# EAGLE board PCBMotores (EAGLE 7.6.0)
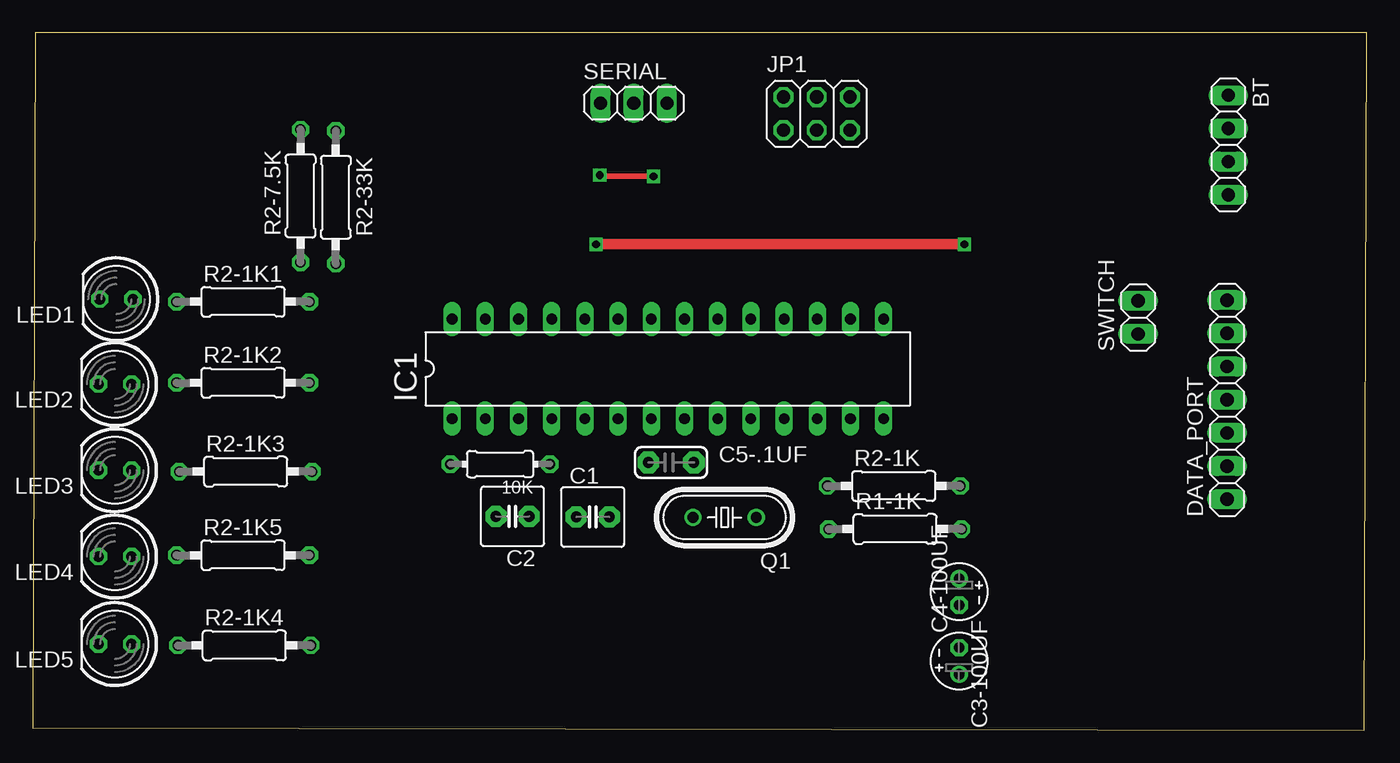
[diagram p0: board, top side]
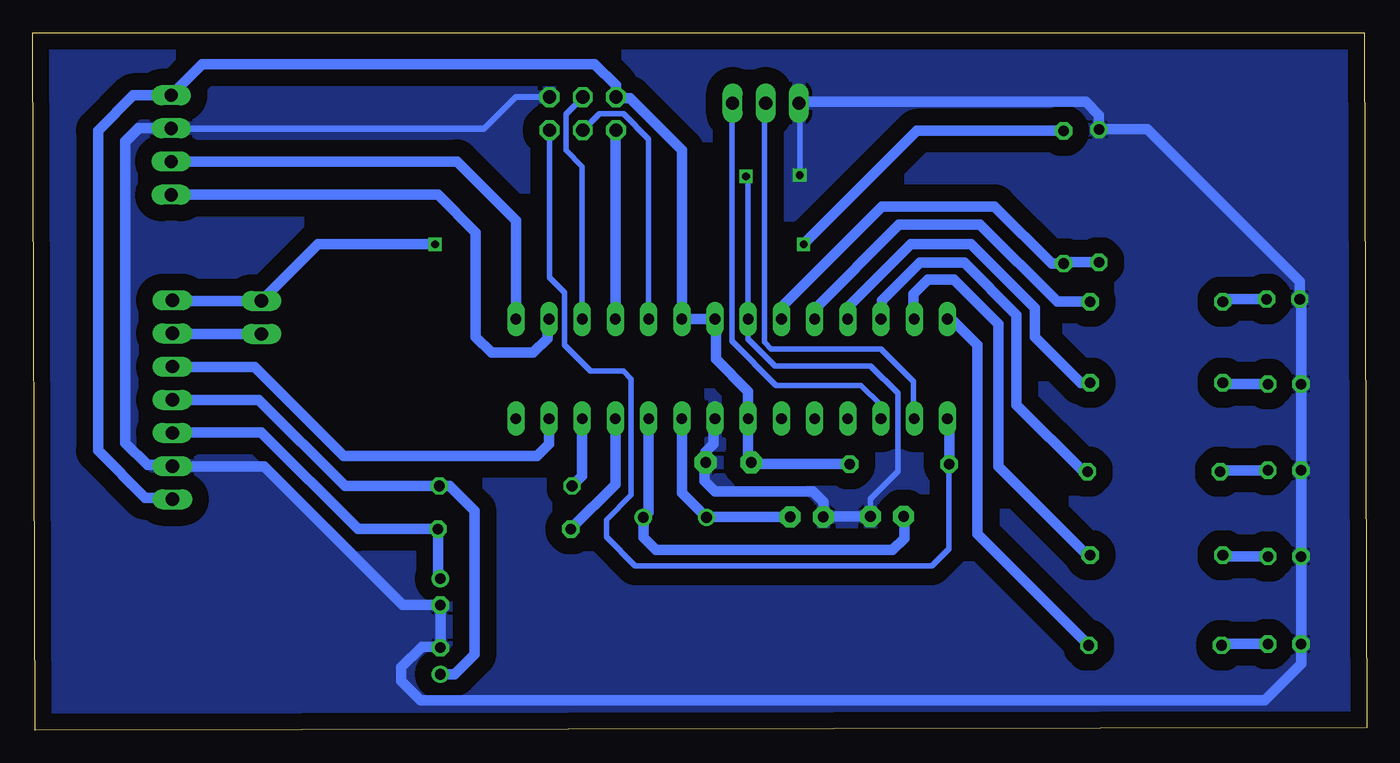
[diagram p1: board, bottom side, seen from below]

Size 102.1 x 53.4 mm. Coordinates in mm from the lower left corner, seen from the top.
Outline: 0,0.2 101.9,0 102.1,53.4 0.2,53.4 0,0.2
Copper layers (1*16): Top 0.035mm / dielectric 1.5mm / Bottom 0.035mm
Design rules "default": minimum track width 10mil, minimum drill 24mil, track to track 8mil, track to pad 8mil, pad to pad 8mil, via to via 8mil, smd to smd 8mil, copper to edge 40mil, drill to drill 8mil, minimum pad ring 10mil, minimum via ring 8mil, stop-mask expansion 4mil, vias tented up to drill 0mil, thermal gap 10mil

## Footprints (pad centres in the part's own frame; a part is rotated, then mirrored left to right if it is on the bottom)
0204/7 = drill 0.813 octagon: 1 -3.81,0; 2 3.81,0
1X04 = drill 1.016 long: 1 -3.81,0; 2 -1.27,0; 3 1.27,0; 4 3.81,0
C2.5-5 = drill 0.813 pad 1.6 octagon: 1 -1.27,0; 2 1.27,0
E2-4 = drill 0.813 pad 1.27: + -1.016,0 | drill 0.813 pad 1.27 octagon: - 1.016,0
C035-055X025 = drill 0.813 pad 1.676 octagon: 1 -1.587,0; 2 1.905,0
1X07 = drill 1.016 long: 1 -7.62,0; 2 -5.08,0; 3 -2.54,0; 4 0,0; 5 2.54,0; 6 5.08,0; 7 7.62,0
DIL28-3 = drill 0.813 long: 1 -16.51,-3.81; 2 -13.97,-3.81; 3 -11.43,-3.81; 4 -8.89,-3.81; 5 -6.35,-3.81; 6 -3.81,-3.81; 7 -1.27,-3.81; 8 1.27,-3.81; 9 3.81,-3.81; 10 6.35,-3.81; 11 8.89,-3.81; 12 11.43,-3.81; 13 13.97,-3.81; 14 16.51,-3.81; 15 16.51,3.81; 16 13.97,3.81; 17 11.43,3.81; 18 8.89,3.81; 19 6.35,3.81; 20 3.81,3.81; 21 1.27,3.81; 22 -1.27,3.81; 23 -3.81,3.81; 24 -6.35,3.81; 25 -8.89,3.81; 26 -11.43,3.81; 27 -13.97,3.81; 28 -16.51,3.81
2X03 = drill 1.016 octagon: 1 -2.54,-1.27; 2 -2.54,1.27; 3 0,-1.27; 4 0,1.27; 5 2.54,-1.27; 6 2.54,1.27
LED5MM = drill 0.813 octagon: A -1.27,0; K 1.27,0
HC49/S = drill 0.813: 1 -2.413,0; 2 2.413,0
0207/10 = drill 0.813 octagon: 1 -5.08,0; 2 5.08,0
1X03 = drill 1.016 long: 1 -2.54,0; 2 0,0; 3 2.54,0
1X02 = drill 1.016 long: 1 -1.27,0; 2 1.27,0

## Placement (x,y rotation side)
10K  [0204/7]  35.77,20.37 180 top
BT  [1X04]  91.5,44.8 270 top
C1  [C2.5-5]  42.86,16.33 0 top
C2  [C2.5-5]  36.72,16.37 180 top
C3-100UF  [E2-4]  70.9,10.6 270 top
C4-100UF  [E2-4]  70.9,5.3 90 top
C5-.1UF  [C035-055X025]  48.7,20.5 0 top
DATA_PORT  [1X07]  91.4,25.3 90 top
IC1  MEGA8-P  [DIL28-3]  48.61,27.67 0 top
JP1  [2X03]  60,47.2 0 top
LED1  [LED5MM]  6.4,33 180 top
LED2  [LED5MM]  6.3,26.5 180 top
LED3  [LED5MM]  6.3,19.9 180 top
LED4  [LED5MM]  6.3,13.3 180 top
LED5  [LED5MM]  6.3,6.6 180 top
Q1  [HC49/S]  52.95,16.29 180 top
R1-1K  [0207/10]  66,15.4 0 top
R2-1K  [0207/10]  65.9,18.7 0 top
R2-1K1  [0207/10]  16.1,32.8 0 top
R2-1K2  [0207/10]  16.1,26.6 0 top
R2-1K3  [0207/10]  16.3,19.8 0 top
R2-1K4  [0207/10]  16.2,6.5 0 top
R2-1K5  [0207/10]  16.1,13.4 0 top
R2-7.5K  [0207/10]  20.5,40.9 90 top
R2-33K  [0207/10]  23.2,40.8 270 top
SERIAL  [1X03]  46,48 0 top
SWITCH  [1X02]  84.6,31.6 90 top

## Library data of the parts
10K C3-100UF C4-100UF R1-1K R2-1K R2-1K1-R2-1K5 R2-7.5K R2-33K = rcl
BT DATA_PORT JP1 SERIAL SWITCH = pinhead
C1 C2 = capacitor-wima
C5-.1UF = cap-master
IC1 = atmel; OC_FARNELL: unknown; OC_NEWARK: unknown
LED1-LED5 = led
Q1 = crystal; OC_FARNELL: 1667008; OC_NEWARK: unknown

## Nets
5V: 10K.1 BT.1 C5-.1UF.1 DATA_PORT.1 IC1.7 IC1.20 IC1.21 JP1.2
ANA_D: C4-100UF.+ DATA_PORT.4 R2-1K.2
ANA_I: C3-100UF.+ DATA_PORT.3 R1-1K.2
BAT: IC1.23 R2-7.5K.1 R2-33K.2
FRENOS: DATA_PORT.5 IC1.13
GND: BT.2 C1.1 C2.1 C3-100UF.- C4-100UF.- C5-.1UF.2 DATA_PORT.2 IC1.8 IC1.22 JP1.6 LED1.K LED2.K LED3.K LED4.K LED5.K R2-7.5K.2 SERIAL.1
MISO: IC1.18 JP1.1
MOSI: IC1.17 JP1.4
N$3: IC1.24 R2-1K1.2
N$4: IC1.25 R2-1K2.2
N$5: IC1.26 R2-1K3.2
N$6: C2.2 IC1.10 Q1.1
N$7: C1.2 IC1.9 Q1.2
N$8: IC1.27 R2-1K5.2
N$9: IC1.28 R2-1K4.2
N$10: LED1.A R2-1K1.1
N$11: LED2.A R2-1K2.1
N$12: LED3.A R2-1K3.1
N$13: LED4.A R2-1K5.1
N$14: LED5.A R2-1K4.1
PWMD: IC1.12 R2-1K.1
PWMI: IC1.11 R1-1K.1
RS: 10K.2 IC1.1 JP1.5
RX: IC1.2 SERIAL.2
RX-BT: BT.3 IC1.15
SCK: IC1.19 JP1.3
SW1: DATA_PORT.6 SWITCH.1
SW2: DATA_PORT.7 R2-33K.1 SWITCH.2
TX: IC1.3 SERIAL.3
TX-BT: BT.4 IC1.16

## Tracks (layer width: path | path; a pad name or v marks a point on that pad's centre or on a via)
5V
  Bottom 0.813: 10K.1 46.98,20.37 C5-.1UF.1 47.34,20.73 IC1.7 47.34,25.94 49.8,28.4 49.8,31.4 IC1.21 IC1.20 52.42,44.42 56.4,48.4 57.39,48.4 JP1.2 57.46,49.36 59.1,51 89.11,51 BT.1 94.39,48.61 97.1,45.9 97.1,21.4 93.5,17.8 91.52,17.8 DATA_PORT.1
ANA_D
  Bottom 0.813: C4-100UF.+ 70.88,4.3 69.8,4.3 68.3,5.8 68.3,16.8 70.2,18.7 R2-1K.2 78.2,18.7 84.8,25.3 DATA_PORT.4
ANA_I
  Bottom 0.813: C3-100UF.+ 71.08,11.8 R1-1K.2 77.2,15.4 84.6,22.8 91.36,22.8 DATA_PORT.3
BAT
  Bottom 0.813: IC1.23 44.8,32.4 37.1,40.1 28.5,40.1 24.12,35.72 R2-33K.2 23.1,35.82 R2-7.5K.1
FRENOS
  Bottom 0.813: IC1.13 62.58,21.92 63.5,21 78.3,21 85.1,27.8 91.36,27.8 DATA_PORT.5
GND  (via drill 0.6)
  Top 0.406: v47.5,42.4 43.5,42.4 v43.4,42.5
  Bottom 0.406: v47.5,42.4 47.34,42.24 IC1.22 47.34,29.94 45.3,27.9 38,27.9 35.9,25.8 35.9,19.8 38,17.7 C2.1 | v43.4,42.5 43.4,47.94 SERIAL.1 | C3-100UF.- 73.98,9.58 84.5,20.1 93,20.1 95.1,22.2 95.1,45.1 94.2,46 67.6,46 67.5,46.1 | 65.13,48.47 65.1,48.5 62.57,48.5 JP1.6 65.13,48.47 | 65.13,48.47 67.5,46.1 | 67.5,46.1 93.7,46.1 95,44.8 95,22.2 93.2,20.4 84.5,20.4 73.6,9.5 71,9.5 70.9,9.6 70.9,6.5 70.8,6.4
  Bottom 0.813: IC1.8 50,23.74 50,21.9 50.61,21.3 C5-.1UF.2 50.7,20.41 50.7,19.1 49.9,18.3 42.4,18.3 41.59,17.49 C1.1 41.55,16.37 C2.1 | C4-100UF.- C3-100UF.- 73.78,9.58 84.4,20.2 91.38,20.2 DATA_PORT.2 91.48,20.3 93.3,20.3 95,22 95,44.8 95,45.1 94.03,46.07 BT.2 | SERIAL.1 43.36,48.1 21.5,48.1 20.5,47.1 R2-7.5K.2 20.48,46 16.8,46 5.13,34.33 LED1.K 5.03,32.9 LED2.K LED3.K LED4.K LED5.K 5,6.57 5,5.1 7.8,2.3 72.4,2.3 73.9,3.8 73.9,4.8 72.3,6.4 70.8,6.4
  pour Bottom (isolate 1.27): 100.8,52 100.6,1.1 1.3,1.2 1.5,52.1
MISO
  Bottom 0.813: IC1.18 57.5,45.89 JP1.1
MOSI
  Bottom 0.406: IC1.17 60.04,43.14 61.3,44.4 61.3,47.17 JP1.4
N$3
  Bottom 0.813: R2-1K1.2 23.7,32.8 29.6,38.7 35.8,38.7 42.4,32.1 42.4,31.62 IC1.24
N$4
  Bottom 0.813: R2-1K2.2 21.9,26.6 25.4,30.1 25.4,32.3 30.3,37.2 34.9,37.2 39.7,32.4 39.7,31.5 IC1.25
N$5
  Bottom 0.813: R2-1K3.2 21.7,19.8 26.8,24.9 26.8,31.8 30.8,35.8 34.2,35.8 37.1,32.9 37.1,31.56 IC1.26
N$6
  Bottom 0.813: IC1.10 54.96,16.69 Q1.1 55.36,14.76 54.4,13.8 36.3,13.8 35.4,14.7 35.4,16.32 C2.2
N$7
  Bottom 0.813: IC1.9 52.42,18.17 Q1.2 50.5,16.33 C1.2
N$8
  Bottom 0.813: R2-1K5.2 21.4,13.4 28.2,20.2 28.2,31.1 31.6,34.5 33.6,34.5 34.7,33.4 34.7,31.54 IC1.27
N$9
  Bottom 0.813: IC1.28 31.78,31.48 29.8,29.5 29.8,15.02 R2-1K4.2
N$10
  Bottom 0.813: LED1.A 10.82,33 R2-1K1.1
N$11
  Bottom 0.813: LED2.A 10.92,26.5 R2-1K2.1
N$12
  Bottom 0.813: LED3.A 11.12,19.9 R2-1K3.1
N$13
  Bottom 0.813: LED4.A 10.92,13.3 R2-1K5.1
N$14
  Bottom 0.813: LED5.A 11.02,6.6 R2-1K4.1
PWMD
  Bottom 0.813: IC1.12 60.04,19.48 R2-1K.1
PWMI
  Bottom 0.813: IC1.11 57.5,18.82 R1-1K.1
RS
  Bottom 0.406: JP1.5 62.54,34.64 61.4,33.5 61.4,29.5 59.4,27.5 56.9,27.5 56.3,26.9 56.3,18 58.2,16.1 58.2,14.8 56,12.6 33.3,12.6 32,13.9 32,20.33 10K.2
  Bottom 0.813: 10K.2 31.96,23.72 IC1.1
RX
  Bottom 0.406: 34.64,24.24 IC1.2 34.7,23.92 34.7,26.7 37.2,29.2 45.6,29.2 46.1,29.7 46.1,47.9 SERIAL.2
RX-BT
  Bottom 0.813: BT.3 69.63,43.53 65.1,39 65.1,31.5 IC1.15
SCK
  Bottom 0.406: IC1.19 54.96,45.26 56.9,47.2 58.73,47.2 JP1.3
SW1
  Bottom 0.813: SWITCH.1 91.35,30.33 DATA_PORT.6
SW2  (via drill 0.6)
  Top 0.813: v43.1,37.2 v71.3,37.2
  Bottom 0.813: DATA_PORT.7 91.35,32.87 SWITCH.2 80.27,37.2 v71.3,37.2 | R2-33K.1 34.42,45.88 v43.1,37.2
TX
  Bottom 0.406: IC1.3 37.18,24.88 38.7,26.4 45.2,26.4 48.6,29.8 48.6,47.94 SERIAL.3
TX-BT
  Bottom 0.813: BT.4 71.09,40.99 68.2,38.1 68.2,30.1 67,28.9 63.8,28.9 62.7,30 62.7,31.36 IC1.16